# Altium PCB PCB_TPM_Module_Talos_II_Final_AltiumDesigner.pcbdoc
Units mil, origin at the board's own origin, x right, y up, seen from the top; angles counter-clockwise.
Board outline 2410 x 2440 mil, 2 copper layers (Top Layer, Bottom Layer); 7 components, 37 nets, 58 pads, 3 vias.
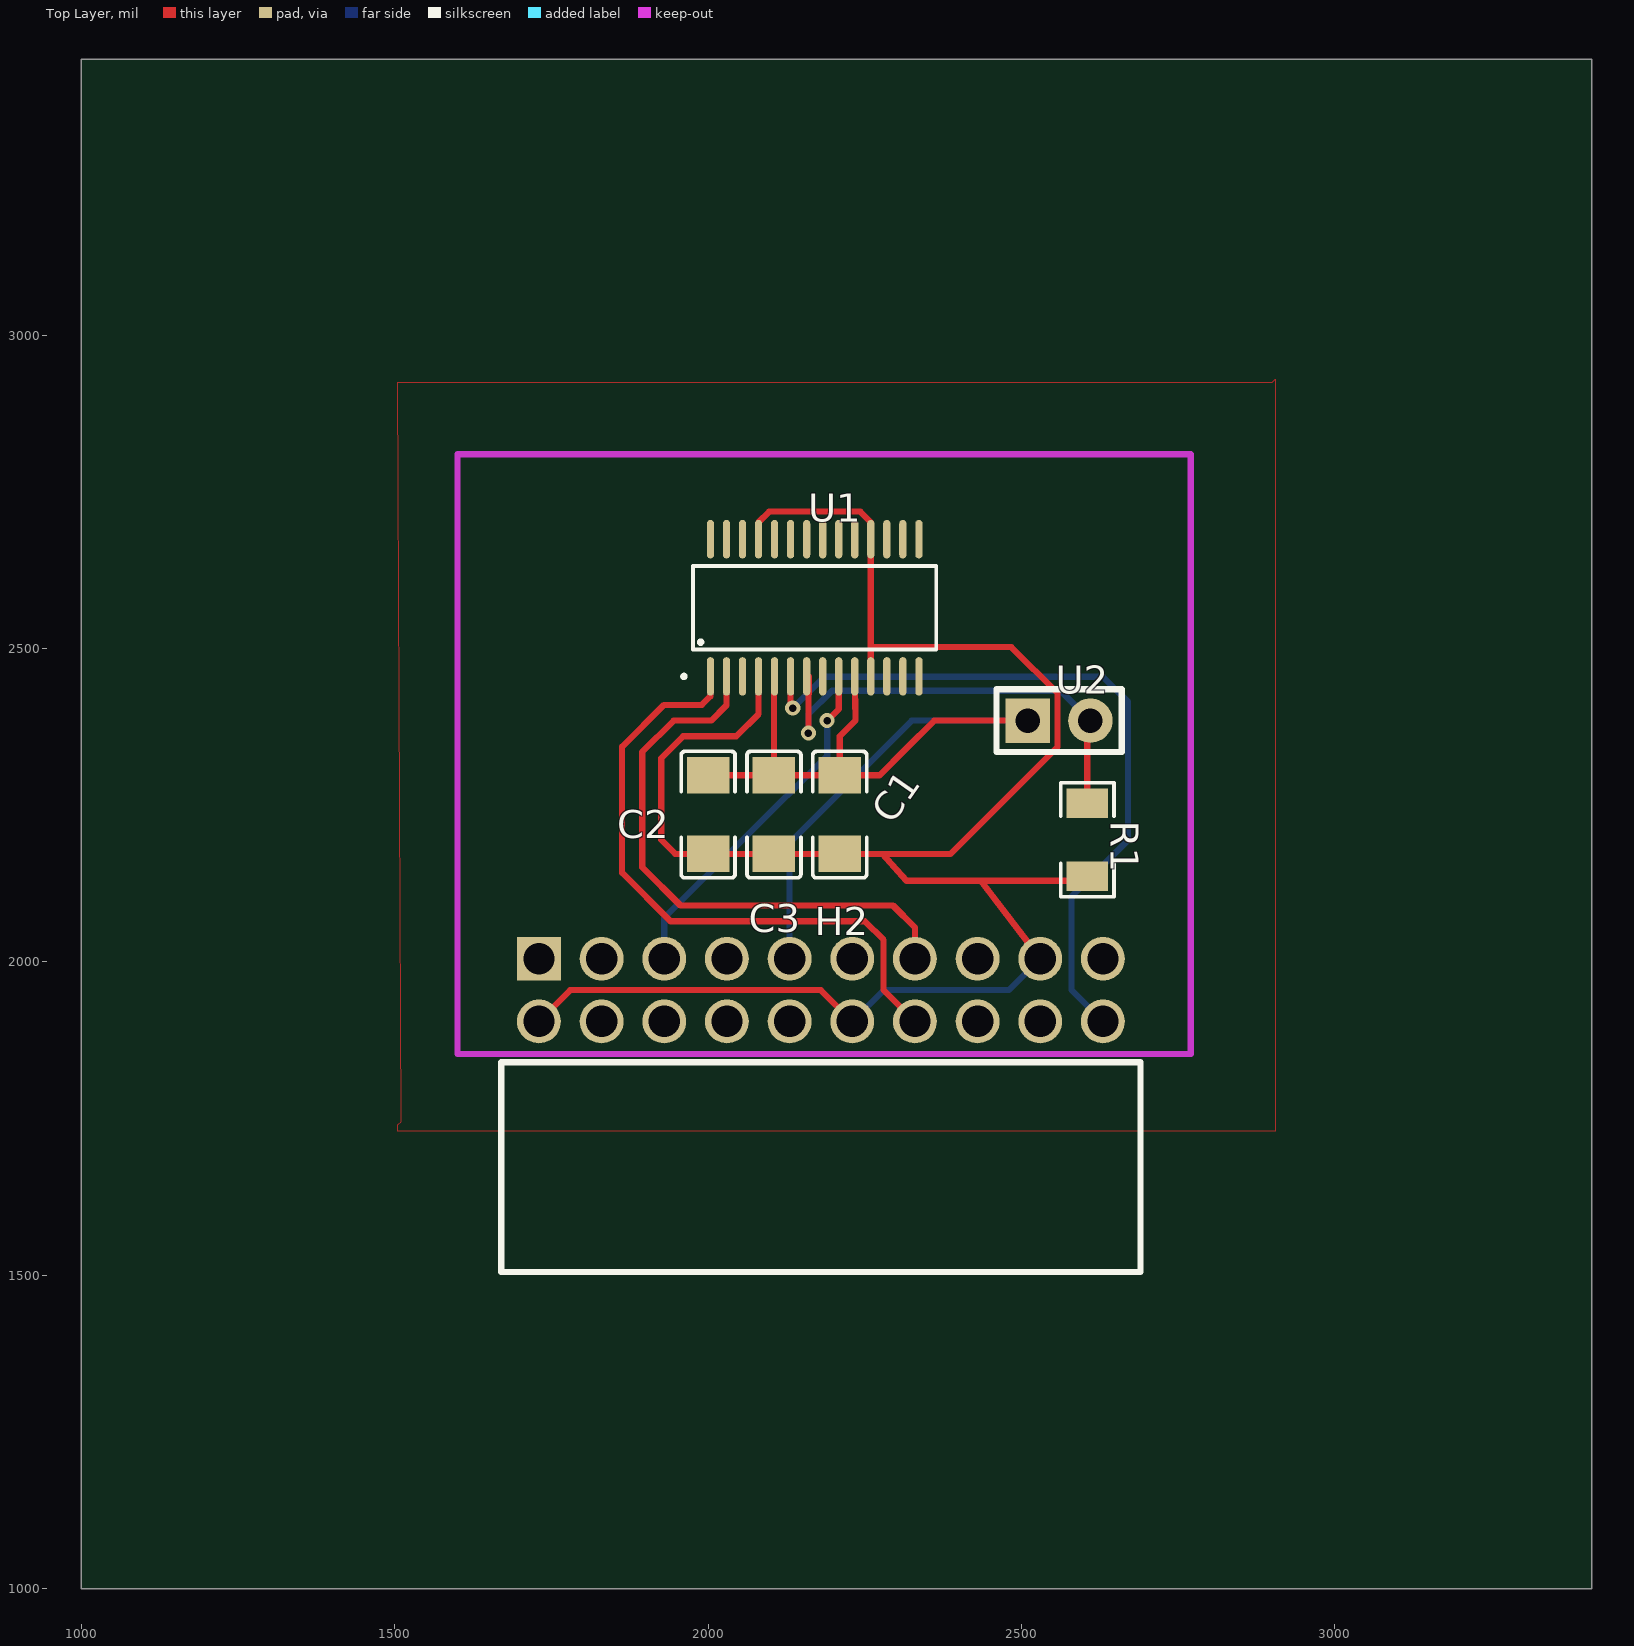
[diagram p0: Top Layer view]
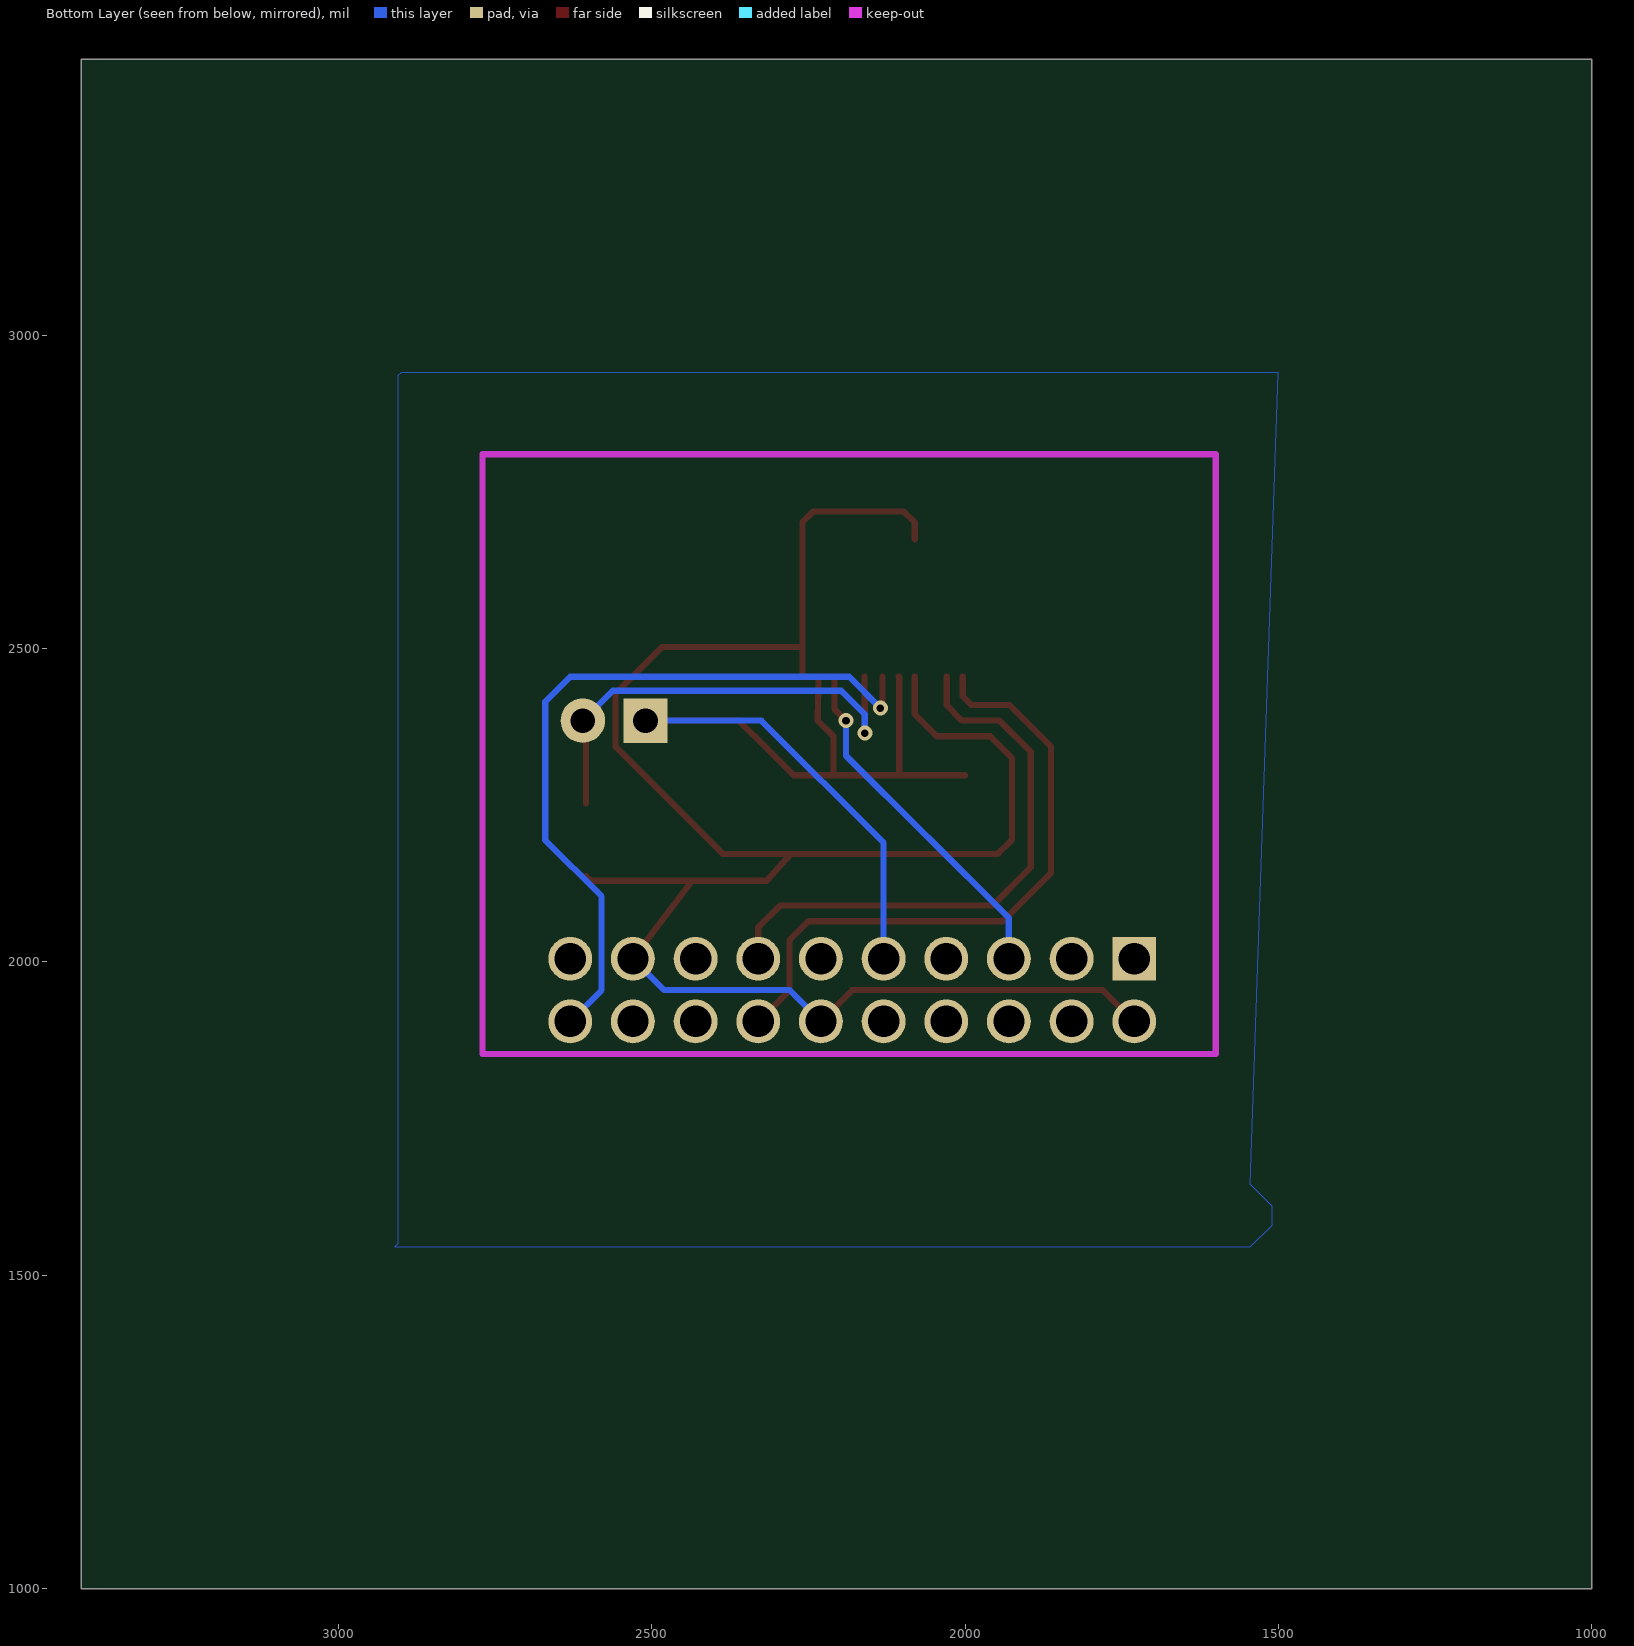
[diagram p1: Bottom Layer view, seen from below]

## Layer stack, top to bottom
Top Layer: signal copper (thickness not stored)
Dielectric: dielectric 12.6, FR-4, Dk 4.8
Bottom Layer: signal copper (thickness not stored)

## Board outline
3410,1000 1000,1000 1000,3440 3410,3440

## Components (designator, comment, footprint, x,y, rotation, side; value= is the part's Value field where it differs from the comment)
C1 "1uF" C1206 2210,2235 r90 top
C2 "100nF" C1206 2000,2235 r90 top
C3 "100nF" C1206 2105,2235 r90 top
H2 "220R-2*10P H=8.5MM Ytype Gold-plated black" HDR-TH_20P-P2.54-H-F-R2-C10-S2.54-W10.2 2180,1955 r0 top
R1 "4.7kΩ" R1206 2605,2195 r270 top
U1 "SLB9645TT12FW13333XUMA2" PG-TSSOP-28_L9.7-W4.4-P0.65-LS6.4-BL 2170,2565 r0 top
U2 "JUMPER2" HDR-TH_2P-P2.54-V-M-1 2560,2385 r0 top

## Footprints (in the part's own frame and the unit in brackets; to place one, negate y for a bottom-side part, rotate by r counter-clockwise, add the part's x,y. Pads: shape width x height; smd on the part's side, far side on the other; paste and mask are expansions set on the pad)
C1206 [mm]
  rect 1.485x1.728 smd: 1(-1.593,0) 2(1.593,0)
  silkscreen extent -2.56,-1.09 2.56,1.09
HDR-TH_2P-P2.54-V-M-1 [mm]
  rect 1.8x1.8 hole 1: 1(-1.27,0)
  round 1.8 hole 1: 2(1.27,0)
  silkscreen extent -2.54,-1.27 2.54,1.27
HDR-TH_20P-P2.54-H-F-R2-C10-S2.54-W10.2 [mil]
  rect 70x70 hole 50: 1(-450,50)
  round 70 hole 50: 2(-450,-50) 3(-350,50) 4(-350,-50) 5(-250,50) 6(-250,-50) 7(-150,50) 8(-150,-50) 9(-50,50) 10(-50,-50) 11(50,50) 12(50,-50) 13(150,50) 14(150,-50) 15(250,50) 16(250,-50) 17(350,50) 18(350,-50) 19(450,50) 20(450,-50)
  silkscreen extent -510,-450 510,-115
PG-TSSOP-28_L9.7-W4.4-P0.65-LS6.4-BL [mm]
  oval 0.294x1.56 smd: 1(-4.225,-2.78) 2(-3.575,-2.78) 3(-2.925,-2.78) 4(-2.275,-2.78) 5(-1.625,-2.78) 6(-0.975,-2.78) 7(-0.325,-2.78) 8(0.325,-2.78) 9(0.975,-2.78) 10(1.625,-2.78) 11(2.275,-2.78) 12(2.925,-2.78) 13(3.575,-2.78) 14(4.225,-2.78) 15(4.225,2.78) 16(3.575,2.78) 17(2.925,2.78) 18(2.275,2.78) 19(1.625,2.78) 20(0.975,2.78) 21(0.325,2.78) 22(-0.325,2.78) 23(-0.975,2.78) 24(-1.625,2.78) 25(-2.275,2.78) 26(-2.925,2.78) 27(-3.575,2.78) 28(-4.225,2.78)
  silkscreen extent -5.37,-2.85 4.93,1.7
R1206 [mil]
  rect 47.54x66.97 smd: 1(-58.22,0) 2(58.22,0)
  silkscreen extent -91,-42 91,42

## Via types
v1: diameter 24.02, hole 12.01, Top Layer to Bottom Layer, tented both sides, 3 vias

## Nets (pads, with @x,y where several pads share a name; then routed paths per layer and width w, separated by ;. In a path a pad name is that pad's centre, name@x,y a point inside that pad or via, vN(x,y) a via of type N, cw(c..) or ccw(c..) an arc to the next point about the centre after c; other vN are vias at no path point)
DAVINT: H2.20 U1.6 | length 1194.2
  Top Layer w10: U1.6@2131.6,2455.5 2131.6,2405 v1(2135,2405)
  Bottom Layer w10: v1(2135,2405) 2185,2455 2630,2455 2670,2415 2670,2194.4 2580,2104.4 2580,1955 H2.20
GND: C1.1 C2.1 C3.1 H2.2 H2.12 H2.17 R1.2 U1.4 U1.11 U1.18 U1.25 | length 3419.4
  Top Layer w10: H2.2 1780,1955 2180,1955 H2.12 ; U1.4@2080.4,2455.5 2080.4,2395.4 2045,2360 1960,2360 1925,2325 1925,2195 1947.7,2172.3 C2.1 C3.1 C1.1 ; U1.25 2080.43,2701.23 2097.72,2718.52 2242.63,2718.52 2259.57,2701.58 U1.18 2259.57,2502.36 ; U1.11 2259.57,2502.36 ; 2273.58,2172.3 C1.1 ; 2277.86,2172.3 2316.6,2129.28 2530,2129.28 2597.5,2129.28 R1.2 ; 2435.72,2129.28 H2.17 ; C1.1 2386.84,2172.3 2557.67,2343.13 2557.67,2428.38 2483.69,2502.36 2259.57,2502.36
  Bottom Layer w10: H2.12 2280,1955 2480,1955 H2.17
H2_1: H2.1
H2_3: H2.3
H2_4: H2.4
H2_6: H2.6
H2_7: H2.7
H2_8: H2.8
H2_10: H2.10
H2_11: H2.11
H2_15: H2.15
H2_16: H2.16
H2_18: H2.18
H2_19: H2.19
RESET: H2.5 U1.9 | length 566.1
  Top Layer w10: v1(2190,2385) 2208.39,2403.39 U1.9
  Bottom Layer w10: H2.5 1930.1,2070.1 2190,2328.9 v1(2190,2385)
S$25: 
SCL: H2.13 U1.2 | length 920.1
  Top Layer w10: U1.2@2029.3,2455.5 2029.3,2409.3 2005,2385 1945,2385 1895,2335 1895,2150.9 1955.9,2090 2295,2090 2330,2055 H2.13
SDA: H2.14 U1.1 | length 1019.4
  Top Layer w10: U1.1@2003.7,2455.5 2003.7,2423.7 1990,2410 1929.6,2410 1862.7,2343.1 1862.7,2142.3 1940,2065 2250,2065 2280,2035 2280,1955 H2.14
U1_3: U1.3
U1_7: R1.1 U1.7 U2.2 | length 739.7
  Top Layer w10: v1(2160,2365) 2160,2426.82 2160.59,2427.41 U1.7@2160.59,2455.28 ; R1.1 2605,2380 U2.2
  Bottom Layer w10: v1(2160,2365) 2160,2395 2197.7,2432.7 2562.3,2432.7 U2.2
U1_8: U1.8
U1_12: U1.12
U1_13: U1.13
U1_14: U1.14
U1_15: U1.15
U1_16: U1.16
U1_17: U1.17
U1_19: U1.19
U1_20: U1.20
U1_21: U1.21
U1_22: U1.22
U1_23: U1.23
U1_24: U1.24
U1_26: U1.26
U1_27: U1.27
U1_28: U1.28
VCC: C1.2 C2.2 C3.2 H2.9 U1.5 U1.10 U2.1 | length 1519.5
  Top Layer w10: C2.2@2001.21,2297.7 C2.2 C3.2 ; U1.5@2106,2455.5 2105,2454.5 C3.2 ; U1.10@2234,2455.5 2235,2385 2210,2360 C1.2 ; U2.1 2360.88,2385 2315,2339.12 2273.58,2297.7 C1.2 ; C3.2 C1.2
  Bottom Layer w10: H2.9 2130,2190 2325,2385 2462.4,2385 U2.1

## Polygon pours and split planes (outlines as drawn)
GND on Bottom Layer (solid): 1500,2940 2900,2940 2905,2935 2905,1550 2910,1545 1545,1545 1510,1580 1510,1610 1545,1645
GND on Top Layer (solid): 1505,2925 2900,2925 2905,2930 2905,1730 1505,1730 1505,1740 1510,1745